# EAGLE board Headphone-Amplifier-ClassAB-Stereo-alt3 (EAGLE 7.6.0)
4x4 - Three Transistor Headphone Amplifier - Class AB http://www.electronics-diy.com/4x4.php
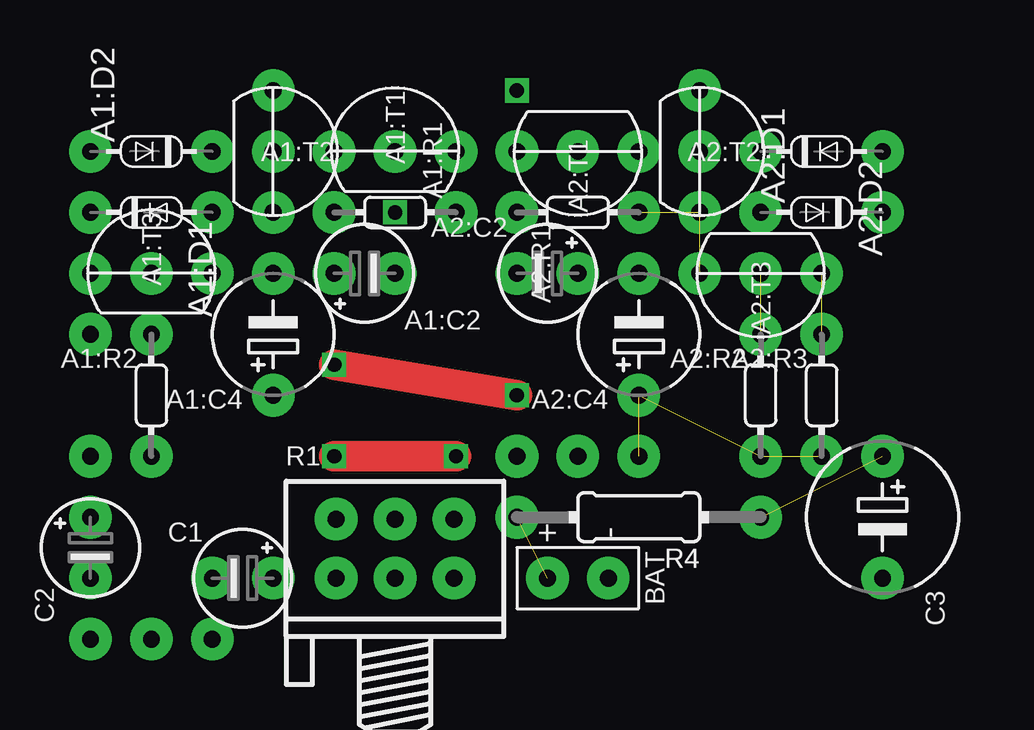
[diagram p0: board, top side]
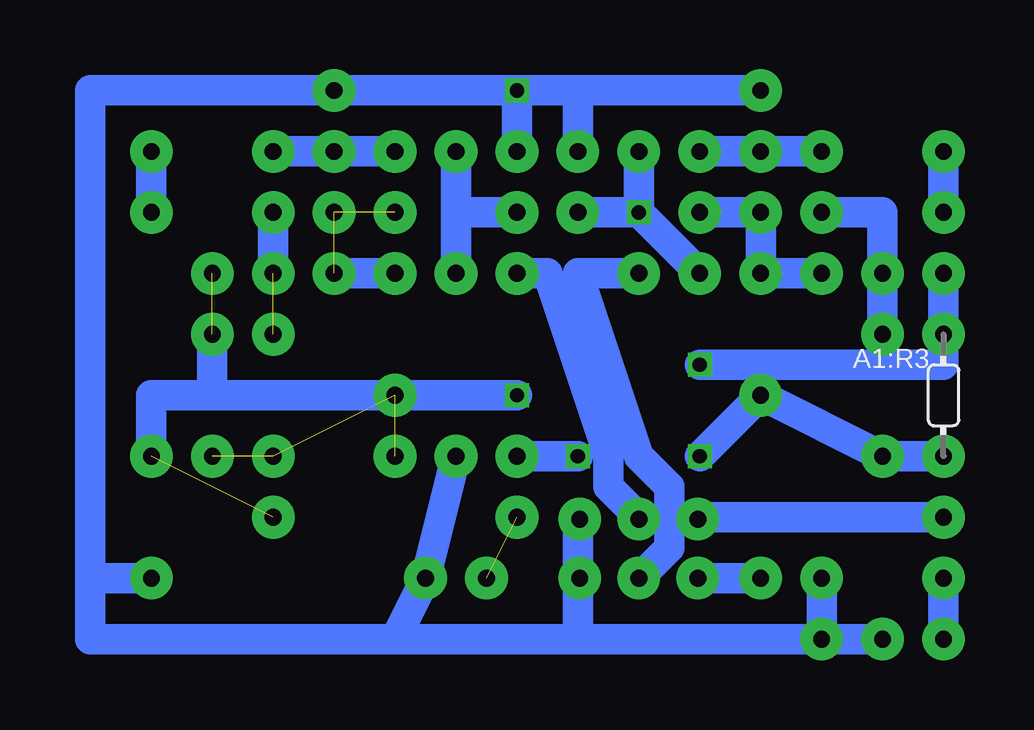
[diagram p1: board, bottom side, seen from below]

No outline drawn. Coordinates in mm, seen from the top.
Copper layers (1*16): Top 0.035mm / dielectric 1.5mm / Bottom 0.035mm
Design rules "default": minimum track width 10mil, minimum drill 24mil, track to track 8mil, track to pad 8mil, pad to pad 8mil, via to via 8mil, smd to smd 8mil, copper to edge 40mil, drill to drill 8mil, minimum pad ring 10mil, minimum via ring 8mil, stop-mask expansion 4mil, vias tented up to drill 0mil, thermal gap 10mil

## Footprints (pad centres in the part's own frame; a part is rotated, then mirrored left to right if it is on the bottom)
E2,5-4 = drill 0.7 pad 1.778: + 0,1.27; - 0,-1.27
E5-5/V = drill 0.7 pad 1.778: + 0,2.54; - 0,-2.54
DO34-5V = drill 0.7 pad 1.778: A 0,2.54; C 0,-2.54
0202/5-V = drill 0.7 pad 1.778: 1 0,2.54; 2 0,-2.54
TO92-CBE = drill 0.7 pad 1.778: B 0,0; C 0,2.54; E 0,-2.54
SPAD+- = drill 0.7 pad 1.778: 1 0,-1.27; 2 0,1.27
E5-6 = drill 0.7 pad 1.778: + -2.54,0; - 2.54,0
SPAD-3 = drill 0.7 pad 1.778: 1 -2.54,0; 2 0,0; 3 2.54,0
POT-STEREO-2X3 = drill 0.7 pad 1.778: 1-A -2.46,-2.54; 1-E 2.46,-2.54; 1-S 0,-2.54; 2-A -2.46,-0.08; 2-E 2.46,-0.08; 2-S 0,-0.08
0204/10 = drill 0.7 pad 1.778: 1 -5.08,0; 2 5.08,0

## Placement (x,y rotation side)
A1:C2  4.7μF  [E2,5-4]  19.05,17.78 90 top
A1:C4  220μF  [E5-5/V]  15.24,15.24 180 top
A1:D1  1N4148  [DO34-5V]  10.16,20.32 270 top
A1:D2  1N4148  [DO34-5V]  10.16,22.86 90 top
A1:R1  100kΩ  [0202/5-V]  20.32,20.32 270 top
A1:R2  330  [0202/5-V]  10.16,12.7 0 top
A1:R3  100  [0202/5-V]  7.62,12.7 0 bottom
A1:T1  BC547  [TO92-CBE]  20.32,22.86 90 top
A1:T2  BC557  [TO92-CBE]  15.24,22.86 0 top
A1:T3  BC547  [TO92-CBE]  10.16,17.78 90 top
A2:C2  4.7μF  [E2,5-4]  26.67,17.78 270 top
A2:C4  220μF  [E5-5/V]  30.48,15.24 180 top
A2:D1  1N4148  [DO34-5V]  38.1,20.32 90 top
A2:D2  1N4148  [DO34-5V]  38.1,22.86 270 top
A2:R1  100kΩ  [0202/5-V]  27.94,20.32 90 top
A2:R2  330  [0202/5-V]  35.56,12.7 0 top
A2:R3  100  [0202/5-V]  38.1,12.7 0 top
A2:T1  BC547  [TO92-CBE]  27.94,22.86 270 top
A2:T2  BC557  [TO92-CBE]  33.02,22.86 0 top
A2:T3  BC547  [TO92-CBE]  35.56,17.78 270 top
BAT  SPAD+-+-  [SPAD+-]  27.94,5.08 90 top
C1  4.7μF  [E2,5-4]  13.97,5.08 270 top
C2  4.7μF  [E2,5-4]  7.62,6.35 0 top
C3  100-1000μF  [E5-6]  40.64,7.62 270 top
IN  SAUDIO  [SPAD-3]  10.16,2.54 180 top
OUT  SAUDIO  [SPAD-3]  27.94,10.16 0 top
R1  POT-STEREO  [POT-STEREO-2X3]  20.32,7.62 0 top
R4  22Ω  [0204/10]  30.48,7.62 180 top

## Library data of the parts
A1:C2 A1:C4 A2:C2 A2:C4 C1-C3 = c
A1:D1 A1:D2 A2:D1 A2:D2 = d
A1:R1-A1:R3 A2:R1-A2:R3 R1 R4 = r
A1:T1-A1:T3 A2:T1-A2:T3 = t
BAT IN OUT = pad

## Nets
+3V: BAT.2 R4.2
A1:N$1: A1:D1.A A1:R2.1 A1:T3.B
A1:N$2: A1:D2.C A1:T1.C A1:T2.B
A1:N$3: A1:D1.C A1:D2.A
A1:N$4: A1:C4.- A1:R1.2 A1:T2.E A1:T3.E
A1:N$7: A1:C2.+ A1:R1.1 A1:T1.B
A2:N$1: A2:D1.A A2:R2.1 A2:T3.B
A2:N$2: A2:D2.C A2:T1.C A2:T2.B
A2:N$3: A2:D1.C A2:D2.A
A2:N$4: A2:C4.- A2:R1.2 A2:T2.E A2:T3.E
A2:N$7: A2:C2.+ A2:R1.1 A2:T1.B
GND: A1:T1.E A1:T2.C A2:T1.E A2:T2.C BAT.1 C3.- IN.2 OUT.2 R1.1-E R1.2-E
N$1: A1:R3.1 A1:T3.C A2:R3.1 A2:T3.C C3.+ R4.1
N$2: A1:C4.+ A1:R2.2 A1:R3.2 OUT.1
N$3: C2.- IN.3
N$4: C2.+ R1.2-A
N$5: C1.+ R1.1-A
N$6: A1:C2.- R1.1-S
N$7: A2:C2.- R1.2-S
N$8: A2:C4.+ A2:R2.2 A2:R3.2 OUT.3
N$10: C1.- IN.1

## Tracks (layer width: path | path; a pad name or v marks a point on that pad's centre or on a via)
+3V  (1 unrouted)
A1:N$1
  Bottom 1.27: A1:R2.1 A1:T3.B 10.16,20.32 A1:D1.A
A1:N$2
  Bottom 1.27: A1:T1.C A1:T2.B A1:D2.C
A1:N$3
  Bottom 1.27: A1:D1.C A1:D2.A
A1:N$4
  Bottom 1.27: A1:R1.2 A1:T2.E A1:C4.- A1:T3.E
A1:N$7  (via drill 0.6)
  Bottom 1.27: A1:T1.B v20.32,20.32 | A1:R1.1 v20.32,20.32 | v20.32,20.32 A1:C2.+
A2:N$1  (1 unrouted)
  Bottom 1.27: A2:D1.A A2:T3.B
A2:N$2
  Bottom 1.27: A2:D2.C A2:T1.C A2:T2.B
A2:N$3
  Bottom 1.27: A2:D2.A A2:D1.C
A2:N$4  (2 unrouted)
  Bottom 1.27: A2:T3.E A2:C4.-
A2:N$7
  Bottom 1.27: 27.94,20.32 A2:T1.B | 27.94,20.32 A2:R1.1 27.94,20.32 | 27.94,20.32 27.94,19.05 A2:C2.+
GND  (via drill 0.6)
  Bottom 1.27: 43.18,5.08 43.18,25.4 A2:T2.C v25.4,25.4 | A2:T1.E v25.4,25.4 | v25.4,25.4 A1:T2.C 22.86,25.4 A1:T1.E | IN.2 22.86,2.54 | 22.86,7.62 22.86,5.08 22.86,2.54 | 22.86,2.54 30.48,2.54 | 30.48,2.54 BAT.1 OUT.2 | 30.48,2.54 43.18,2.54 43.18,5.08 | 43.18,5.08 C3.-
N$1  (via drill 0.6)  (2 unrouted)
  Top 1.27: v17.78,13.97 v25.4,12.7
  Bottom 1.27: A1:T3.C A1:R3.1 7.62,13.97 v17.78,13.97 | v25.4,12.7 38.1,12.7 | 38.1,12.7 A2:R3.1 | C3.+ 40.64,12.7 38.1,12.7
N$2  (via drill 0.6)
  Top 1.27: v17.78,10.16 v22.86,10.16
  Bottom 1.27: A1:R3.2 A1:R2.2 A1:C4.+ v17.78,10.16 | v22.86,10.16 OUT.1
  other vias: 15.24,12.7
N$3
  Bottom 1.27: C2.- IN.3
N$4
  Bottom 1.27: C2.+ 17.78,7.62 | 17.78,7.62
N$5
  Bottom 1.27: 17.78,5.08 C1.+
N$6
  Bottom 1.27: R1.1-S 19.05,6.35 19.05,8.89 20.32,10.16 22.86,17.78 A1:C2.-
N$7
  Bottom 1.27: A2:C2.- 24.13,17.78 21.59,10.16 21.59,8.89 20.32,7.62
N$8  (3 unrouted)
N$10
  Bottom 1.27: C1.- IN.1